# Altium PCB BRD151104.pcbdoc
Units mm, origin at the board's own origin, x right, y up, seen from the top; angles counter-clockwise.
Board outline 46 x 20.5 mm, 2 copper layers (Top Layer, Bottom Layer); 10 components, 8 nets, 30 pads, 2 vias.
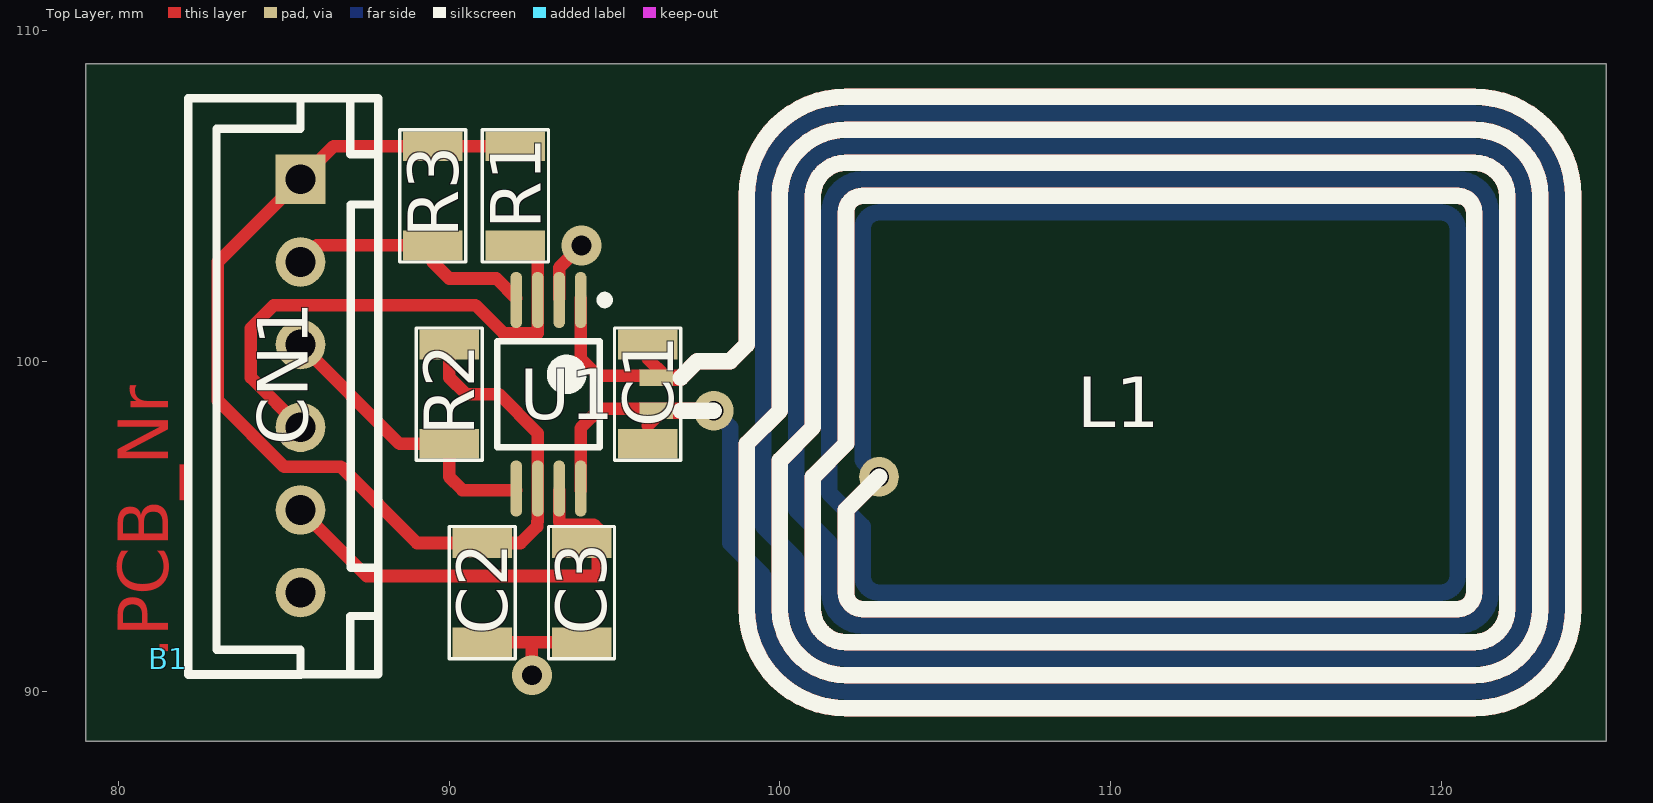
[diagram p0: Top Layer view]
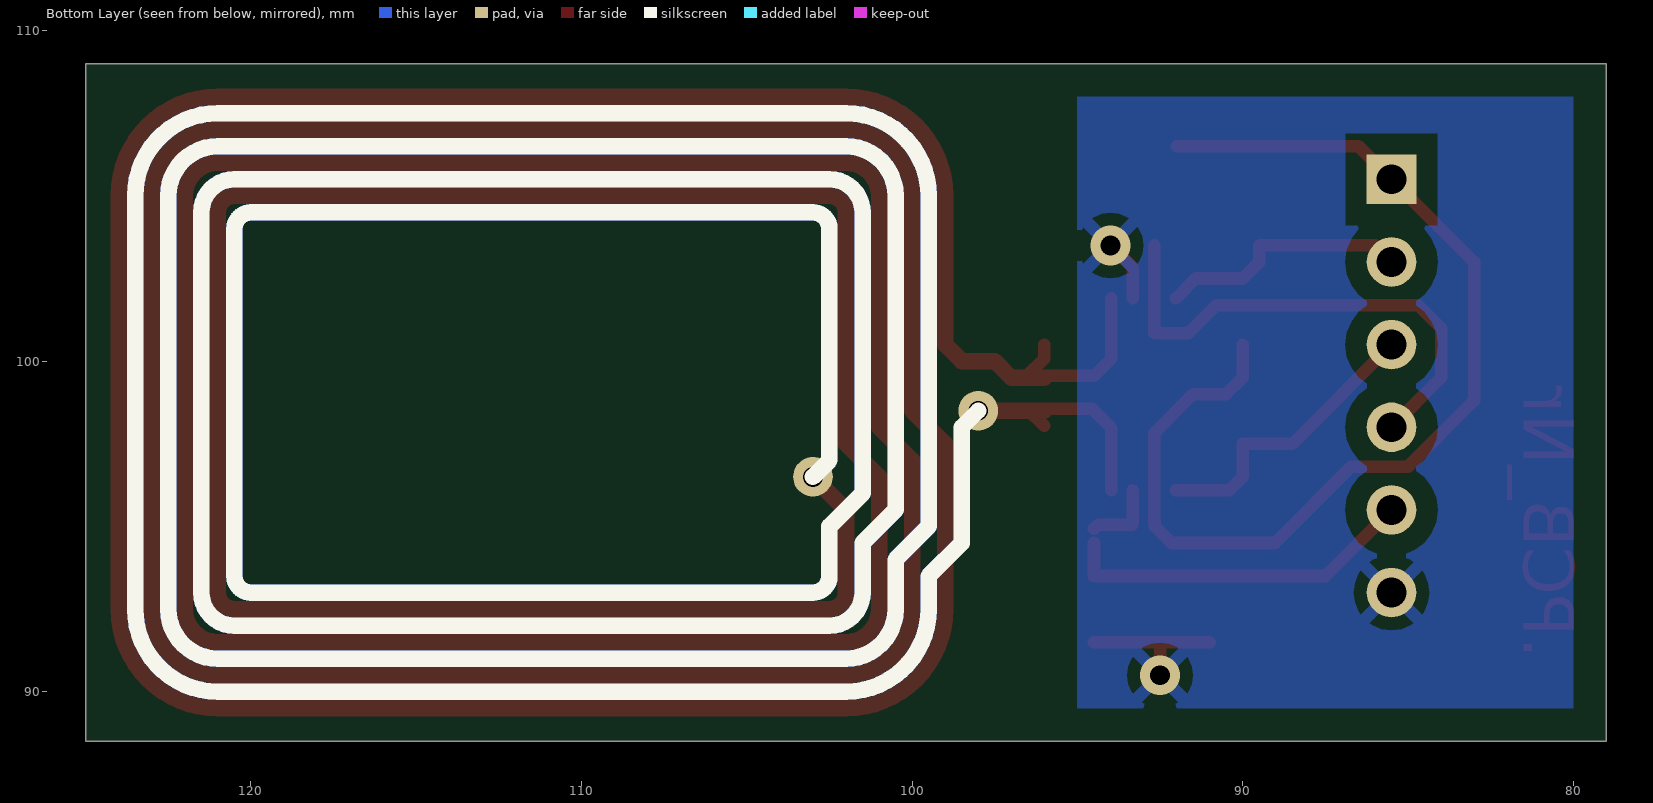
[diagram p1: Bottom Layer view, seen from below]
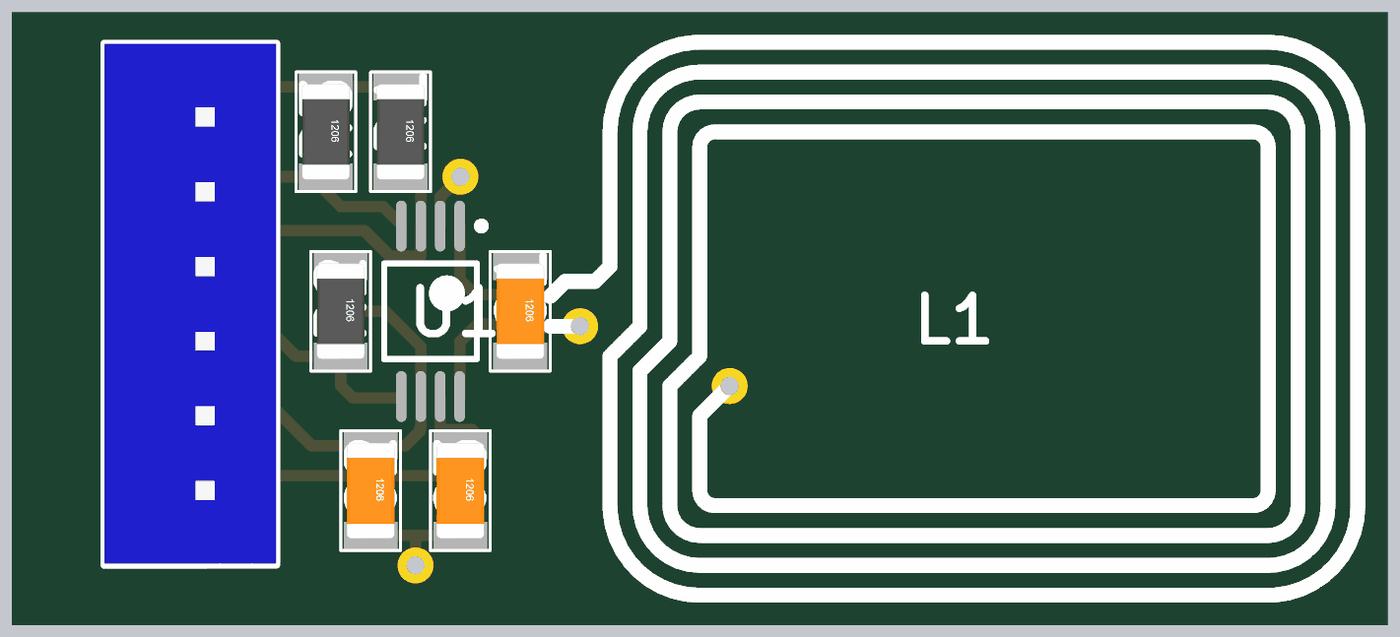
[diagram p2: 3D render of the assembled board from above, using the file's embedded part models]

## Layer stack, top to bottom
Top Solder: solder mask 0.0102, Solder Resist, Dk 3.5
Top Layer: signal copper 0.0356
Dielectric1: dielectric 0.32, FR-4, Dk 4.8
Bottom Layer: signal copper 0.0356
Bottom Solder: solder mask 0.0102, Solder Resist, Dk 3.5

## Board outline
79,88.5 125,88.5 125,109 79,109

## Design rules (kind name [scope] priority, off if disabled: settings)
BoardOutlineClearance [All] p1: gap=0.254 except(0: Arc-SplitContinuation Track-SplitContinuation SMDPad-SplitContinuation THPad-SplitContinuation Via-SplitContinuation Fill-SplitContinuation Poly-SplitContinuation Region-SplitContinuation Text-SplitContinuation; 1: Poly-OutlineEdge)
Clearance SC_TSSOP8 [HasFootprint('SC_TSSOP8') vs HasFootprint('SC_TSSOP8')] p1: gap=0.203
Clearance SC_MSOP8 [HasFootprint('SC_MSOP8') vs HasFootprint('SC_MSOP8')] p2: gap=0.229
Clearance SC_SOT23-6 [HasFootprint('SC_SOT23-6') vs HasFootprint('SC_SOT23-6')] p3: gap=0.229
Clearance Clearance_polygons [InPolygon] p4: gap=0.635
Clearance Clearance_All [All] p5: gap=0.254
HoleSize [All] p1: absolutevalues=TRUE maxlimit=3.2 minlimit=0.6 maxpercent=80.000 minpercent=20.000
MinimumAnnularRing [All] p1: minimumring=0.254
MinimumSolderMaskSliver SilkscreenOverComponentPads [All] p2: minsoldermaskwidth=0.254
PlaneClearance [All] p1: clearance=1.27
PolygonConnect [All] p1: connectstyle=Relief reliefconductorwidth=0.381 reliefentries=4 polygonreliefangle="45 Angle" airgapwidth=0.381
RoutingVias [All] p1: holewidth=0.6 width=1.2 viastyle="Through Hole" minholewidth=0.6 minwidth=1.2 maxholewidth=0.6 maxwidth=1.2
SolderMaskExpansion [All] p1: expansion=0
Width [All] p1: maxlimit=1.27 minlimit=0.381 preferedwidth=0.508
28 further rules are at their usual default settings.

## Components (designator, comment, footprint, x,y, rotation, side; value= is the part's Value field where it differs from the comment)
B1 "BRD151104/0" MC_BoardNr 81.5,91 r90 top
C1 "18n/NP0" CA_STD1206_H16 96,99 r270 top
C2 "100N" CA_STD1206_H16 91,93 r270 top
C3 "100N" CA_STD1206_H16 94,93 r270 top
CN1 "CNXH006M1" CN_JST-B6B-XH 85.5,105.5 r90 top
L1 "NFC_Class6" CL_NFC_Class6 111.5,99 r0 top net-tie
R1 "YRES3K3" RE_STD1206_H6 92,105 r90 top
R2 "YRES3K3" RE_STD1206_H6 90,99 r90 top
R3 "YRES3K3" RE_STD1206_H6 89.5,105 r90 top
U1 "NT3H1101W0FTT" SC_TSSOP8_N 93,99 r270 top

## Footprints (in the part's own frame and the unit in brackets; to place one, negate y for a bottom-side part, rotate by r counter-clockwise, add the part's x,y. Pads: shape width x height; smd on the part's side, far side on the other; paste and mask are expansions set on the pad)
CA_STD1206_H16 [mm] "CA_1206"
  rect 0.9x1.8 smd: 1(-1.5,0) 2(1.5,0)
  silkscreen extent -2,-1 2,1, body extent -1.6,-0.8 1.6,0.8, height 1
CL_NFC_Class6 [mm]
  round 1.2 hole 0.6: 0(-13.5,-0.5) 0(-8.5,-2.5)
  rect 1x0.5 smd: 1(-15.24,0.5) 2(-15.24,-0.5)
  Top Layer lines w0.5: -15.5,-0.5 -13.5,-0.5 ; -15.5,0.5 -14.5,0.5 -14,1 -13,1 -12.5,1.5 -12.5,6 cw(c-9.5,6) -9.5,9 9.5,9 cw(c9.5,6) 12.5,6 ; -8.5,-2.5 -9.5,-3.5 -9.5,-6 ccw(c-9,-6) -9,-6.5 9,-6.5 ccw(c9,-6) 9.5,-6 9.5,5.5 ; -9.5,-9.5 ccw(c-9.5,-9.5) -9.5,-9.5 ; -9.5,-9.5 cw(c-9.5,-6.5) -12.5,-6.5 -12.5,-1.5 -11.5,-0.5 -11.5,6 cw(c-9.5,6) -9.5,8 9.5,8 cw(c9.5,6) 11.5,6 11.5,-6.5 cw(c9.5,-6.5) 9.5,-8.5 -9.5,-8.5 cw(c-9.5,-6.5) -11.5,-6.5 -11.5,-2 -10.5,-1 -10.5,6 cw(c-9.5,6) -9.5,7 9.5,7 cw(c9.5,6) 10.5,6 10.5,-6.5 cw(c9.5,-6.5) 9.5,-7.5 -9.5,-7.5 cw(c-9.5,-6.5) -10.5,-6.5 -10.5,-2.5 -9.5,-1.5 -9.5,5.5 cw(c-9,5.5) -9,6 9,6 cw(c9,5.5) 9.5,5.5 ; -9.5,-9.5 9.5,-9.5 ccw(c9.5,-6.5) 12.5,-6.5 12.5,6 ; 9.5,5.5 ccw(c9.5,5.5) 9.5,5.5 ; 12.5,6 ccw(c12.5,6) 12.5,6 ; 12.5,6 ccw(c12.5,6) 12.5,6
  Bottom Layer lines w0.5: -13.5,-0.5 -13,-1 -13,-1.25 -13,-4.5 -12,-5.5 -12,-6.5 ccw(c-9.5,-6.5) -9.5,-9 9.5,-9 ccw(c9.5,-6.5) 12,-6.5 12,6 ccw(c9.5,6) 9.5,8.5 -9.5,8.5 ccw(c-9.5,6) -12,6 -12,-4 -11,-5 -11,-6.5 ccw(c-9.5,-6.5) -9.5,-8 9.5,-8 ccw(c9.5,-6.5) 11,-6.5 11,6 ccw(c9.5,6) 9.5,7.5 -9.5,7.5 ccw(c-9.5,6) -11,6 -11,-3.5 -10,-4.5 -10,-6 ccw(c-9,-6) -9,-7 9,-7 ccw(c9,-6) 10,-6 10,5.5 ccw(c9,5.5) 9,6.5 -9,6.5 ccw(c-9,5.5) -10,5.5 -10,-3 -9,-4 -9,-5.5 ccw(c-8.5,-5.5) -8.5,-6 8.5,-6 ccw(c8.5,-5.5) 9,-5.5 ; -8.5,-2.5 -9,-2 -9,5 cw(c-8.5,5) -8.5,5.5 8.5,5.5 cw(c8.5,5) 9,5 9,-5.5 ; 9,-5.5 9,-5.5
  silkscreen extent -14.5,-9.5 12.5,9
CN_JST-B6B-XH [mm] "JST 2.5mm disconnectable crimp connector"
  rect 1.5x1.5 hole 0.9: 1(0,0)
  round 1.5 hole 0.9: 2(-2.5,0) 3(-5,0) 4(-7.5,0) 5(-10,0) 6(-12.5,0)
  silkscreen extent -14.99,-2.35 2.45,3.4, body extent -14.95,-2.35 2.45,3.4, height 7.02
MC_BoardNr [mm] "Board number"
RE_STD1206_H6 [mm] "RE_1206"
  rect 0.9x1.8 smd: 1(-1.5,0) 2(1.5,0)
  silkscreen extent -2,-1 2,1, body extent -1.6,-0.8 1.6,0.8, height 1.02
SC_TSSOP8_N [mm] "TSOP, 8-Leads, Body 3x4.4mm, Pitch 0.65mm, IPC Medium Density"
  oval 1.7x0.35 smd: 1(-2.85,0.975) 2(-2.85,0.325) 3(-2.85,-0.325) 4(-2.85,-0.975) 5(2.85,-0.975) 6(2.85,-0.325) 7(2.85,0.325) 8(2.85,0.975)
  silkscreen extent -2.97,-1.55 1.6,1.83, body extent -2.25,-1.55 2.25,1.55, height 1.2

## Part data
B1: library part pcb_nr, "Bare PCB"
C1: "18N"
C2 C3: library part YCAM100N, "Chip 100N/50V-X7R"
CN1: "HEADER, VERT, 1x6WAY"
L1: library part NFC_Class6_coil
R1 R2 R3: "3K3"

## Via types
v1: diameter 1.2, hole 0.6, Top Layer to Bottom Layer, 2 vias

## Nets (pads, with @x,y where several pads share a name; then routed paths per layer and width w, separated by ;. In a path a pad name is that pad's centre, name@x,y a point inside that pad or via, vN(x,y) a via of type N, cw(c..) or ccw(c..) an arc to the next point about the centre after c; other vN are vias at no path point)
3V3: C2.1 CN1.1 R1.2 R2.2 R3.2 U1.6 | length 33.5
  Top Layer w0.381: R2.2 90,99.5 90.5,99 91.5,99 92.675,97.825 92.675,96.1 92.675,95.153 92.655,95.134 92.655,95 92.155,94.5 C2.1 89.024,94.5 86.719,96.805 85.005,96.805 83,98.811 83,103 CN1.1 86.5,106.5 R1.2
GND: C2.2 C3.2 CN1.6 U1.2 | length 6.4
  Top Layer w0.381: C2.2 92.5,91.5 ; v1(92.5,90.5) 92.5,91.5 ; U1.2@93.325,101.9 93.325,102.825 v1(94,103.5) ; C3.2@94.5,91.5 C3.2 92.5,91.5
NetC1_1: C1.1 L1.1 U1.1 | length 5.7
  Top Layer w0.381: U1.1@93.975,101.9 93.975,100.075 94.49,99.56 96.26,99.56 96.52,99.56 96,100.08 C1.1
NetC1_2: C1.2 L1.2 U1.8 | length 5.4
  Top Layer w0.381: U1.8@93.975,96.1 93.975,97.975 94.56,98.56 96.52,98.56 96,98.04
NetCN1_2: CN1.2 R3.1 U1.4 | length 7.7
  Top Layer w0.381: CN1.2 86,103.5 R3.1 89.5,103 90,102.5 91.425,102.5 U1.4@92.025,101.9
NetCN1_3: CN1.3 R2.1 U1.5 | length 8.9
  Top Layer w0.381: CN1.3 88.5,97.5 R2.1 90,96.5 90.4,96.1 U1.5@92.025,96.1
NetCN1_4: CN1.4 R1.1 U1.3 | length 15.6
  Top Layer w0.381: CN1.4 84,99.5 84,101 84.694,101.695 90.789,101.695 91.638,100.846 92.673,100.846 92.673,101.9 92.675,101.9 R1.1@92.675,103.5
VOUT: C3.1 CN1.5 U1.7 | length 13.1
  Top Layer w0.381: CN1.5 87.5,93.5 94.5,93.5 C3.1@94.5,94.5 ; U1.7@93.325,96.1 93.327,96.098 93.327,95.151 93.344,95.134 93.344,95.046 94.362,95.046 94.371,95.054 C3.1@94.5,94.925
pads on no net: L1.0

## Polygon pours and split planes (outlines as drawn)
GND on Bottom Layer "GND_BOT" (solid, remove dead copper, pour order 2): 95,109 95,89 79,89 79,109 95,109

## Silkscreen, mask and mechanical layers (free items; w line width, h text height)
Mechanical 4:
  lines w0.127: 5.08,0 0,0 ; 35.56,140.97 5.08,140.97 ; 48.26,0 48.26,5.08 ; 48.26,140.97 48.26,146.05 ; 73.66,12.725 187.96,12.725 ; 73.66,20.345 187.96,20.345 ; 73.66,27.965 111.76,27.965 ; 96.52,0 96.52,5.08 ; 96.52,140.97 96.52,146.05 ; 111.76,5.105 111.76,20.345 111.76,35.585 ; 144.78,0 144.78,5.08 ; 144.78,140.97 144.78,146.05 ; 165.1,5.105 165.1,20.345 ; 187.96,0 193.04,0 ; 0,0 193.04,0 ; 0,0 0,146.05 193.04,146.05 193.04,0 ; 5.08,140.97 187.96,140.97 187.96,5.08 5.08,5.08 5.08,140.97 ; 73.66,5.105 73.66,35.585 ; 73.66,5.105 187.96,5.105 187.96,35.585 111.76,35.585 ; 73.66,5.105 38.1,5.105 38.1,35.585 73.66,35.585 ; 73.66,35.585 111.76,35.585 ; 0,73.025 5.08,73.025 0,73.025 ; 187.96,73.025 193.04,73.025 187.96,73.025
  text "A" at 168.529,143.993 h1.78 r90
  text "D" at 25.019,142.723 h1.78 r270
  text "C" at 72.644,142.723 h1.78 r270
  text "B" at 118.364,142.723 h1.78 r270
  text "2" at 3.429,110.338 h1.78 r90
  text "2" at 191.389,110.338 h1.78 r90
  text "1" at 3.429,37.313 h1.78 r90
  text "1" at 191.389,37.313 h1.78 r90
  text "ENGINEER:" at 74.93,33.045 h1.14
  text "TITLE:" at 113.03,33.045 h1.14
  text ".ProjectName" at 119.38,26.238 h2.5
  text "PCB DESIGNER:" at 74.93,25.552 h1.14
  text ".DrawnByX" at 87.757,22.581 h2.5
  text "DATE:" at 74.93,17.805 h1.14
  text "PART NO.:" at 113.03,17.805 h1.14
  text "REV:" at 166.37,17.805 h1.14
  text ".PRINT_DATE" at 76.2,14.757 h1.78
  text ".RevisionNR" at 166.421,14.427 h2.5
  text "FILE NAME:" at 74.93,10.185 h1.14
  text "DWG NO:" at 113.03,10.185 h1.14
  text "SCALE:" at 166.37,10.185 h1.14
  text ".PCB_Nr" at 121.996,7.747 h2.5
  text ".PCB_FILE_NAME_NO_PATH" at 76.2,7.137 h1.78
  text "D" at 22.022,1.905 h1.78 r270
  text "C" at 70.028,1.905 h1.78 r270
  text "B" at 118.542,1.905 h1.78 r270
  text "A" at 166.599,1.905 h1.78 r270
Mechanical 5:
  lines w0.127: 5.08,0 0,0 ; 5.08,12.725 119.38,12.725 ; 5.08,20.345 119.38,20.345 ; 27.94,5.105 27.94,20.345 ; 48.26,0 48.26,5.08 ; 48.26,140.97 48.26,146.05 ; 81.28,5.105 81.28,20.345 81.28,35.585 ; 81.28,27.965 119.38,27.965 ; 96.52,0 96.52,5.08 ; 96.52,140.97 96.52,146.05 ; 144.78,0 144.78,5.08 ; 144.78,140.97 144.78,146.05 ; 157.48,140.97 187.96,140.97 ; 187.96,0 193.04,0 ; 0,0 193.04,0 ; 0,0 0,146.05 193.04,146.05 193.04,0 ; 81.28,35.585 5.08,35.585 5.08,5.105 119.38,5.105 ; 81.28,35.585 119.38,35.585 ; 119.38,5.105 119.38,35.585 ; 119.38,5.105 154.94,5.105 154.94,35.585 119.38,35.585 ; 187.96,140.97 5.08,140.97 5.08,5.08 187.96,5.08 187.96,140.97 ; 0,73.025 5.08,73.025 0,73.025 ; 187.96,73.025 193.04,73.025 187.96,73.025
  text "A" at 25.019,143.993 h1.78 r270
  text "B" at 72.644,143.993 h1.78 r270
  text "C" at 118.364,143.993 h1.78 r270
  text "D" at 166.624,143.993 h1.78 r270
  text "2" at 1.524,110.338 h1.78 r270
  text "2" at 189.484,110.338 h1.78 r270
  text "1" at 1.524,37.313 h1.78 r270
  text "1" at 189.484,37.313 h1.78 r270
  text "TITLE:" at 80.01,33.045 h1.14
  text "ENGINEER:" at 118.11,33.045 h1.14
  text ".ProjectName" at 74.549,26.441 h2.5
  text "PCB DESIGNER:" at 118.11,25.552 h1.14
  text ".DrawnByX" at 105.664,22.504 h2.5
  text "REV:" at 26.67,17.805 h1.14
  text "PART NO.:" at 80.01,17.805 h1.14
  text "DATE:" at 118.11,17.805 h1.14
  text ".PRINT_DATE" at 116.84,14.757 h1.78
  text ".RevisionNR" at 27.483,13.36 h2.5
  text "SCALE:" at 26.67,10.185 h1.14
  text "DWG NO:" at 80.01,10.185 h1.14
  text "FILE NAME:" at 118.11,10.185 h1.14
  text ".PCB_FILE_NAME_NO_PATH" at 116.84,7.137 h1.78
  text ".PCB_Nr" at 72.263,6.883 h2.5
  text "B" at 70.104,3.023 h1.78 r270
  text "C" at 118.364,3.023 h1.78 r270
  text "D" at 166.624,3.023 h1.78 r270
  text "A" at 21.844,1.753 h1.78 r270
Mechanical 8:
  the board outline again, w0.5
Drill Drawing:
  lines w0.203: 7.62,40.64 7.62,38.1 10.16,38.1 ; 7.62,137.16 7.62,139.7 10.16,139.7 ; 182.88,38.1 185.42,38.1 185.42,40.64 ; 182.88,139.7 185.42,139.7 185.42,137.16
  text ".Legend" at 42,54.5 h2

## Dimensions
79,109 to 125,109 on Mechanical 2
79,109 to 79,88.5 on Mechanical 2